# EAGLE board BUZZI-13 (EAGLE 4.15)
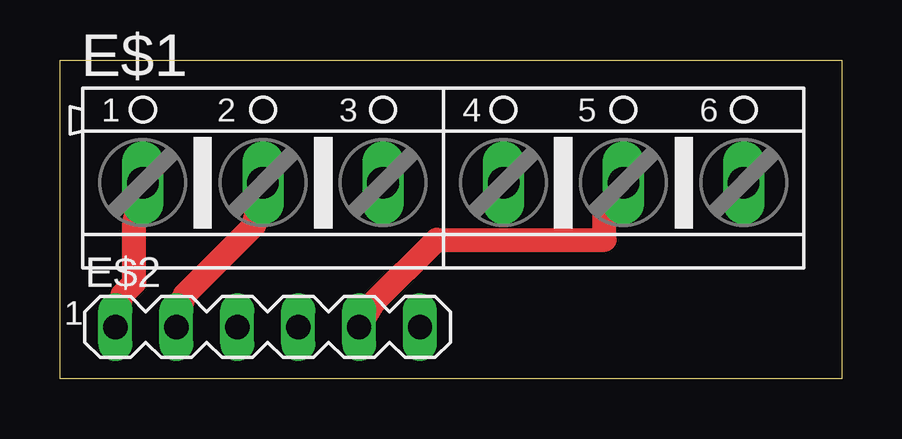
[diagram p0: board, top side]
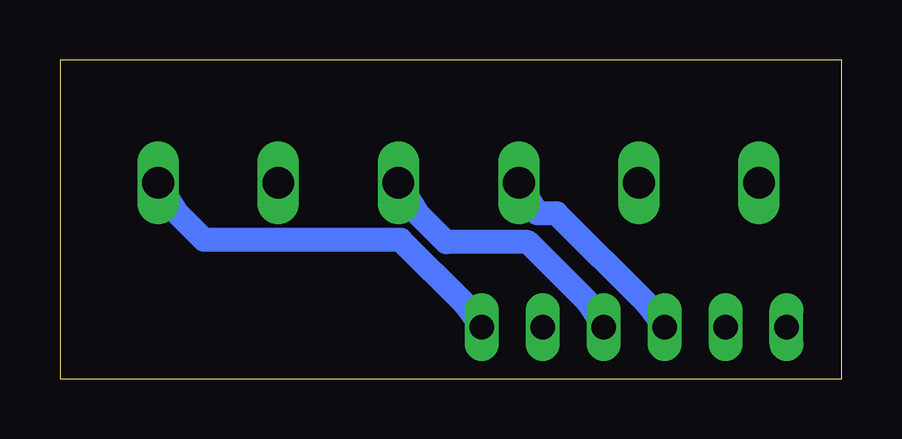
[diagram p1: board, bottom side, seen from below]

Size 32.6 x 13.3 mm. Coordinates in mm from the lower left corner, seen from the top.
Outline: 0,13.3 32.6,13.3 32.6,0 0,0 0,13.3
Copper layers (1*16): Top 0.035mm / dielectric 1.5mm / Bottom 0.035mm
Design rules "PCB-POOL": minimum track width 6mil, minimum drill 12mil, track to track 6mil, track to pad 6mil, pad to pad 6mil, via to via 6mil, smd to smd 6mil, copper to edge 20mil, drill to drill 8mil, minimum pad ring 8mil, minimum via ring 6mil, stop-mask expansion 3mil, vias tented up to drill 0mil, thermal gap 8mil
Net classes: 0 default: width 1 mm

## Footprints (pad centres in the part's own frame; a part is rotated, then mirrored left to right if it is on the bottom)
AK500/6 = drill 1.321 long: 1 -12.522,0; 2 -7.518,0; 3 -2.515,0; 4 2.515,0; 5 7.518,0; 6 12.522,0
MA06-1 = drill 1.016 long: 1 -6.35,0; 2 -3.81,0; 3 -1.27,0; 4 1.27,0; 5 3.81,0; 6 6.35,0

## Placement (x,y rotation side)
E$1  [AK500/6]  15.98,8.18 0 top
E$2  [MA06-1]  8.66,2.16 0 top

## Library data of the parts
E$1 = con-ptr500
E$2 = con-lstb

## Nets
S$1: E$1.1 E$2.1
S$2: E$1.2 E$2.2
S$3: E$1.3 E$2.3
S$4: E$1.4 E$2.4
S$5: E$1.5 E$2.5
S$6: E$1.6 E$2.6

## Tracks (layer width: path | path; a pad name or v marks a point on that pad's centre or on a via)
S$1
  Top 1: E$2.1 2.6,3.5 3.1,4 3.1,6.5 E$1.1
S$2
  Top 1: E$2.2 5.2,3.5 8.1,6.4 8.1,6.5 E$1.2
S$3
  Bottom 1: E$2.3 8.1,3.1 11.9,6.9 12.7,6.9 E$1.3
S$4
  Bottom 1: E$2.4 10.6,3.2 13.1,5.7 16.5,5.7 17.7,6.9 E$1.4
S$5
  Top 1: E$2.5 13.1,3.2 15.7,5.8 22.7,5.8 22.7,6.9 E$1.5
S$6
  Bottom 1: E$2.6 15.7,3.1 18.4,5.8 26.6,5.8 27.7,6.9 E$1.6